# Altium PCB MU-VIDEO-HDMI.PcbDoc
Units mm, origin at the board's own origin, x right, y up, seen from the top; angles counter-clockwise.
Board outline 156.8 x 90 mm, 4 copper layers (Top Layer, Int1, Int2, Bottom Layer), stack 1.036 mm thick; 4 components, 132 nets, 170 pads, 0 vias.
Unrouted connection lines stored in the file: 127.
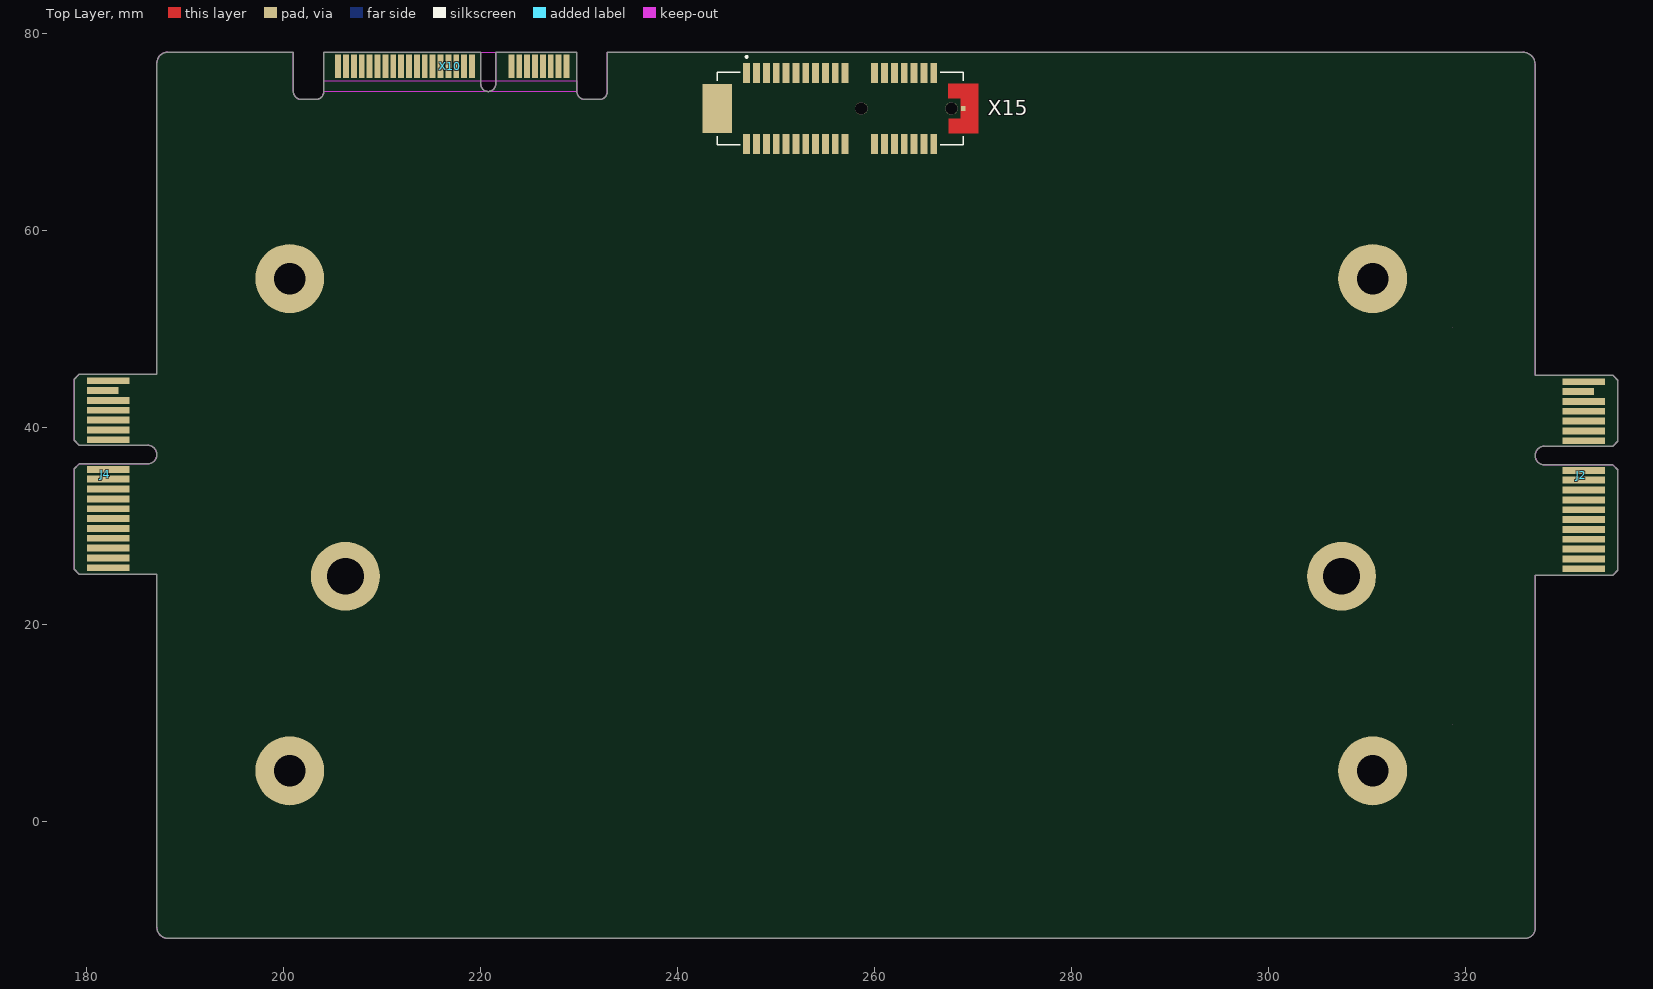
[diagram p0: Top Layer view]
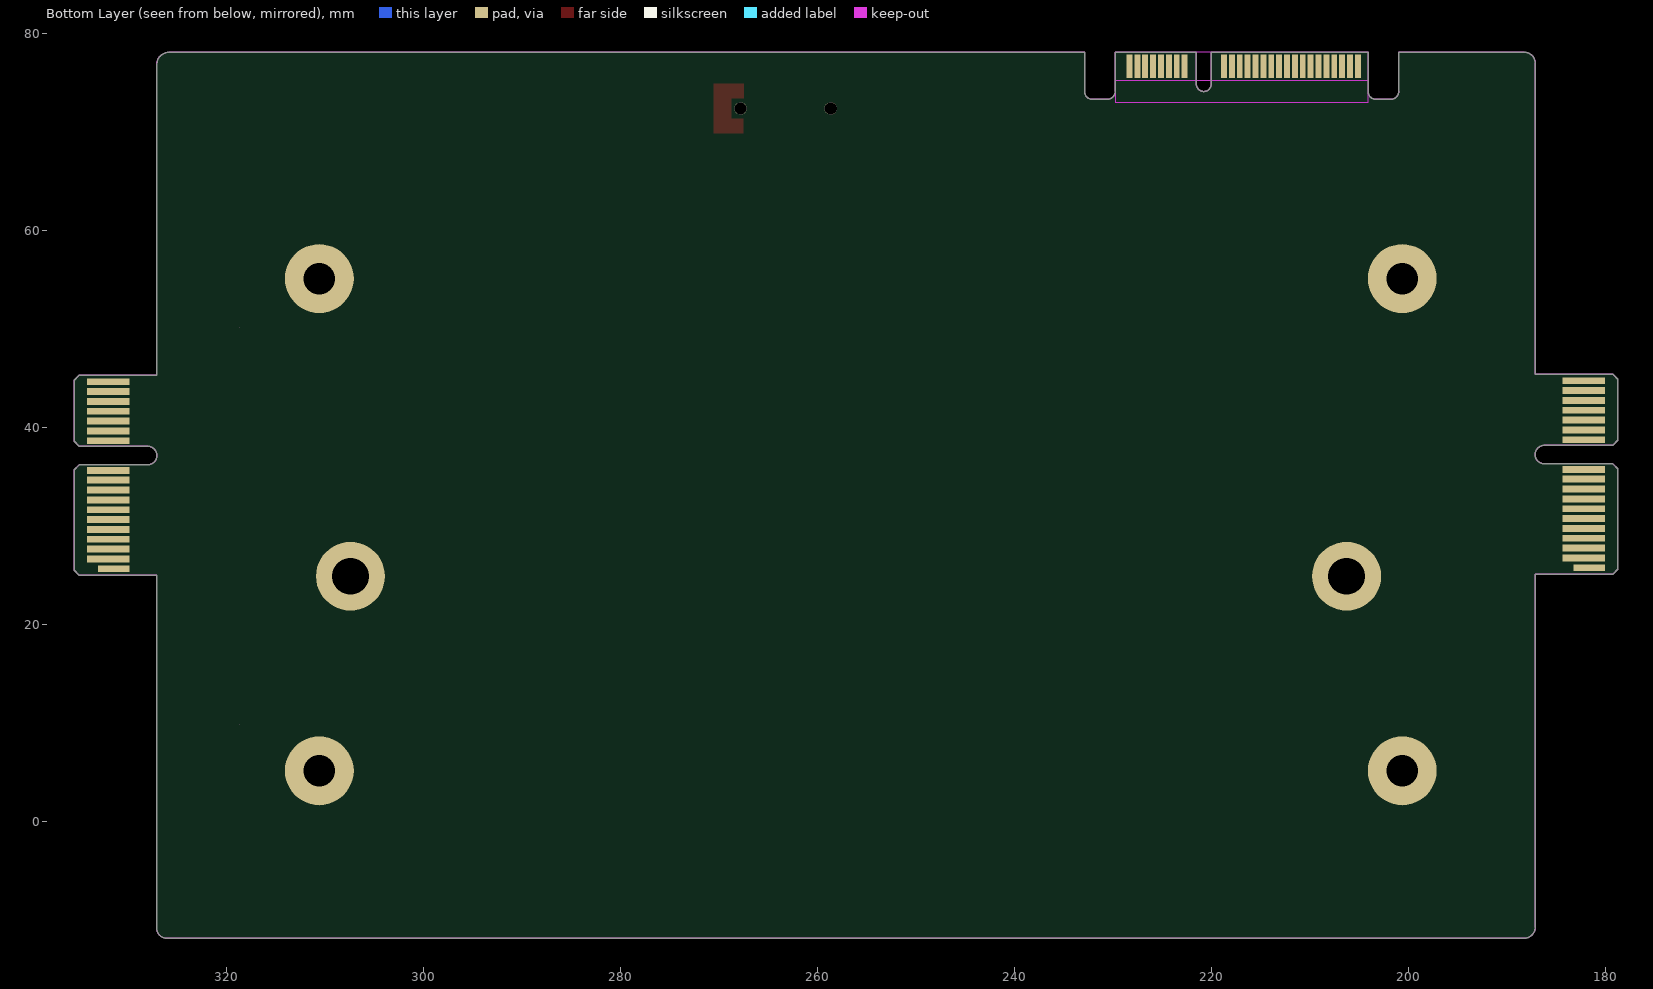
[diagram p1: Bottom Layer view, seen from below]
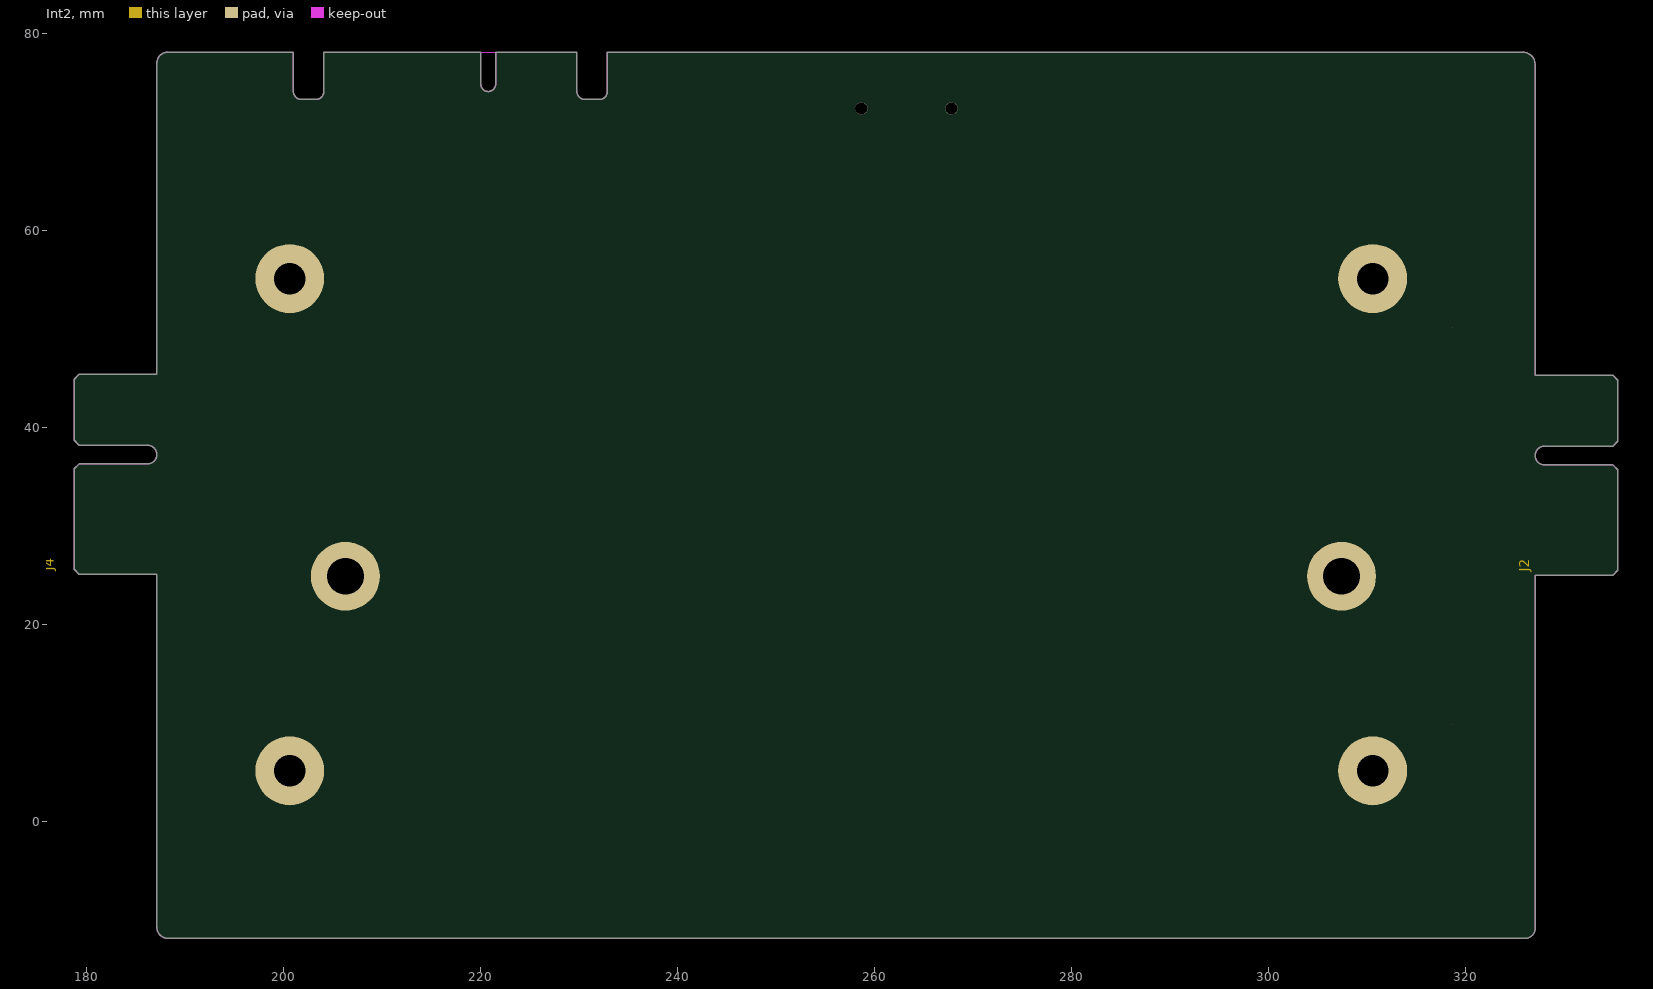
[diagram p2: Int2]

## Layer stack, top to bottom
Top Solder: solder mask 0.0254, SM-001, Dk 3.5
Top Layer: signal copper 0.018
Dielectric 1: prepreg 0.127, FR4, Dk 4.2
Int1: signal copper 0.018
Dielectric 2: core 0.71, FR4, Dk 4.6
Int2: signal copper 0.018
Dielectric 3: prepreg 0.127, FR4, Dk 4.2
Bottom Layer: signal copper 0.018
Bottom Solder: solder mask 0.0254, SM-001, Dk 3.5

## Board outline
178.725,35.8 179.225,36.3 186.175,36.3 ccw(c186.175,37.25) 187.125,37.25 ccw(c186.175,37.25) 186.175,38.2 179.225,38.2 178.725,38.7 178.725,44.9 179.225,45.4 187.125,45.4 187.125,77.025 cw(c188.225,77.025) 188.225,78.125 200.985,78.125 200.985,74.15 ccw(c201.81,74.15) 201.81,73.325 203.283,73.325 ccw(c203.283,74.125) 204.083,74.125 204.083,78.125 220.033,78.125 220.033,74.875 ccw(c220.783,74.875) 220.783,74.125 220.785,74.125 ccw(c220.785,74.874) 221.533,74.874 221.533,78.125 229.783,78.125 229.783,74.151 ccw(c230.61,74.151) 230.61,73.325 232.085,73.325 ccw(c232.085,74.125) 232.885,74.125 232.885,78.125 325.855,78.125 cw(c325.855,76.855) 327.125,76.855 327.125,45.3 335.025,45.3 335.525,44.8 335.525,38.6 335.025,38.1 328.075,38.1 ccw(c328.075,37.15) 327.125,37.15 ccw(c328.075,37.15) 328.075,36.2 335.025,36.2 335.525,35.7 335.525,25.5 335.025,25 327.125,25 327.125,-10.875 cw(c326.125,-10.875) 326.125,-11.875 265.825,-11.875 188.225,-11.875 cw(c188.225,-10.775) 187.125,-10.775 187.125,25.1 179.225,25.1 178.725,25.6

## Design rules (kind name [scope] priority, off if disabled: settings)
BoardOutlineClearance [All] p1: gap=0.4 ignorepadtopadclearanceinfootprint=FALSE
Clearance Clearance_1 [InDifferentialPairClass('MDI_DIFF100') or InDifferentialPairClass('LVDS')or InDifferentialPairClass('PCIE_CLK') or InDifferentialPairClass('PCIE_Z85')or InDifferentialPairClass('USB') vs InPolygonClass('GND')] p1: gap=0.7 ignorepadtopadclearanceinfootprint=FALSE
Clearance [All] p2: gap=0.15 ignorepadtopadclearanceinfootprint=FALSE except(0.25: Arc-Hole Track-Hole SMDPad-Hole THPad-Hole Via-Hole Fill-Hole Poly-Hole Region-Hole Text-Hole)
ComponentClearance ComponentClearance_1 [All] p1: gap=-1 collisioncheckmode=3 verticalgap=-1 showdistances=FALSE
ComponentClearance [InLayerClass('New Class') vs InLayerClass('New Class')] p2: gap=0 collisioncheckmode=3 verticalgap=0 showdistances=FALSE
DiffPairsRouting PCIE_DIFF85 [InDifferentialPairClass('PCIE_Z85')] p1: maxlimit=0.25 minlimit=0.15 mostfreqgap=0.25 toplayer_maxgap=0.15 toplayer_prefgap=0.15 toplayer_minwidth=0.15 toplayer_maxwidth=0.15 toplayer_prefwidth=0.15 midlayer1_mingap=0.25 midlayer1_minwidth=0.15 midlayer1_maxwidth=0.15 midlayer1_prefwidth=0.15 midlayer5_minwidth=0.381 midlayer5_maxwidth=0.381 midlayer5_prefwidth=0.381 bottomlayer_maxgap=0.15 bottomlayer_prefgap=0.15 bottomlayer_minwidth=0.15 bottomlayer_maxwidth=0.15 bottomlayer_prefwidth=0.15 impedanceprofiledriven=TRUE maxuncoupledlength=12.7
DiffPairsRouting PCIE_DIFF100 [InDifferentialPairClass('PCIE_CLK')] p2: maxlimit=0.25 minlimit=0.15 mostfreqgap=0.25 toplayer_maxgap=0.15 toplayer_prefgap=0.15 toplayer_minwidth=0.15 toplayer_maxwidth=0.15 toplayer_prefwidth=0.15 midlayer1_mingap=0.25 midlayer1_minwidth=0.15 midlayer1_maxwidth=0.15 midlayer1_prefwidth=0.15 midlayer5_minwidth=0.381 midlayer5_maxwidth=0.381 midlayer5_prefwidth=0.381 bottomlayer_maxgap=0.15 bottomlayer_prefgap=0.15 bottomlayer_minwidth=0.15 bottomlayer_maxwidth=0.15 bottomlayer_prefwidth=0.15 impedanceprofiledriven=TRUE maxuncoupledlength=12.7
DiffPairsRouting LVDS_DIFF100 [InDifferentialPairClass('LVDS')] p3: maxlimit=0.25 minlimit=0.15 mostfreqgap=0.25 toplayer_maxgap=0.15 toplayer_prefgap=0.15 toplayer_minwidth=0.15 toplayer_maxwidth=0.15 toplayer_prefwidth=0.15 midlayer1_mingap=0.25 midlayer1_minwidth=0.15 midlayer1_maxwidth=0.15 midlayer1_prefwidth=0.15 midlayer5_minwidth=0.381 midlayer5_maxwidth=0.381 midlayer5_prefwidth=0.381 bottomlayer_maxgap=0.15 bottomlayer_prefgap=0.15 bottomlayer_minwidth=0.15 bottomlayer_maxwidth=0.15 bottomlayer_prefwidth=0.15 impedanceprofiledriven=TRUE maxuncoupledlength=12.7
DiffPairsRouting USB_DIFF90 [InDifferentialPairClass('USB')] p4: maxlimit=0.15 minlimit=0.15 mostfreqgap=0.15 toplayer_minwidth=0.195 toplayer_maxwidth=0.195 toplayer_prefwidth=0.195 midlayer1_minwidth=0.381 midlayer1_maxwidth=0.381 midlayer1_prefwidth=0.381 midlayer5_minwidth=0.381 midlayer5_maxwidth=0.381 midlayer5_prefwidth=0.381 bottomlayer_minwidth=0.195 bottomlayer_maxwidth=0.195 bottomlayer_prefwidth=0.195 impedanceprofiledriven=TRUE maxuncoupledlength=12.7
DiffPairsRouting [All] p5: maxlimit=0.254 minlimit=0.16 mostfreqgap=0.2 toplayer_minwidth=0.2 toplayer_maxwidth=0.5 toplayer_prefwidth=0.3 midlayer1_minwidth=0.2 midlayer1_maxwidth=0.5 midlayer1_prefwidth=0.3 midlayer5_minwidth=0.2 midlayer5_maxwidth=0.5 midlayer5_prefwidth=0.3 bottomlayer_minwidth=0.2 bottomlayer_maxwidth=0.5 bottomlayer_prefwidth=0.3 maxuncoupledlength=12.7
FabricationTestpoint [(IsPad And (OnTopLayer Or OnBottomLayer))] p1: side=3 testpointundercomponent=TRUE minsize=1.016 maxsize=2.54 preferedsize=1.524 minholesize=0 maxholesize=1.016 preferedholesize=0.813 testpointgrid=0.025 allowsidetop=TRUE allowsidebottom=TRUE usegrid=TRUE gridtolerance=0
FanoutControl Fanout_Default [All] p1: bgadir=Out bgaviamode=Centered fanoutstyle=Auto fanoutdirection=Alternating viagrid=0.025 // Fanout_Default (Default Rule)
FanoutControl Fanout_Small [(CompPinCount < 5)] p2: bgadir=Out bgaviamode=Centered fanoutstyle=Auto fanoutdirection=OutThenIn viagrid=0.025 // Fanout_Small (Default Rule)
FanoutControl Fanout_LCC [IsLCC] p4: bgadir=Out bgaviamode=Centered fanoutstyle=Auto fanoutdirection=Alternating viagrid=0.025 // Fanout_LCC (Default Rule)
FanoutControl Fanout_BGA [IsBGA] p5: bgadir=Out bgaviamode=Centered fanoutstyle=Auto fanoutdirection=Alternating viagrid=0.025 // Fanout_BGA (Default Rule)
Height [All] p1: minheight=0 maxheight=50 prefheight=12.7
HoleSize [All] p1: absolutevalues=TRUE maxlimit=5 minlimit=0.025 maxpercent=80.000 minpercent=20.000
HoleToHoleClearance HoleToHoleClearance_1 [InPadClass('pad_mult') vs InPadClass('pad_mult')] p1: gap=0 allowstackedmicrovias=TRUE
HoleToHoleClearance [All] p2: gap=0.254 allowstackedmicrovias=TRUE
MatchedLengths MatchedLengths_LVDS_Within [InxSignalClass('LVDS_X')] p1: tolerance=0.5 checknetsindiffpair=TRUE checkdiffpairvsdiffpair=FALSE checkxsignals=FALSE checkothers=FALSE usedelayunits=TRUE delaytolerance=2.000000
MatchedLengths MatchedLengths_LVDS_Group [InxSignalClass('LVDS_X')] p2: tolerance=0.4 checknetsindiffpair=FALSE checkdiffpairvsdiffpair=TRUE checkxsignals=TRUE checkothers=TRUE usedelayunits=TRUE delaytolerance=8.000000
MatchedLengths MatchedLengths_PCIE_Within [InxSignalClass('PCIE_X')] p3: tolerance=0.5 checknetsindiffpair=TRUE checkdiffpairvsdiffpair=FALSE checkxsignals=FALSE checkothers=FALSE usedelayunits=TRUE delaytolerance=2.000000
MatchedLengths MatchedLengths_PCIE_Group [InxSignalClass('PCIE_X')] p4: tolerance=0.5 checknetsindiffpair=FALSE checkdiffpairvsdiffpair=TRUE checkxsignals=TRUE checkothers=TRUE usedelayunits=TRUE delaytolerance=8.000000
MinimumSolderMaskSliver MinimumSolderMaskSliver_1 [InComponent('W2') vs InPadClass('pad_mult')] p1: minsoldermaskwidth=0
MinimumSolderMaskSliver [All] p2: minsoldermaskwidth=0.01
PlaneClearance [All] p1: clearance=0.5
PlaneConnect [All] p1: planeconnectstyle=Direct reliefexpansion=0.5 reliefentries=4 reliefconductorwidth=0.25 reliefairgap=0.25
PolygonConnect PolygonConnect_2 [All vs InPolygonClass('PWR')] p1: connectstyle=Direct reliefconductorwidth=0.254 reliefentries=4 polygonreliefangle="90 Angle" airgapwidth=0.254
PolygonConnect PolygonConnect_1 [IsVia] p2: connectstyle=Direct reliefconductorwidth=0.254 reliefentries=4 polygonreliefangle="90 Angle" airgapwidth=0.254
PolygonConnect [All] p3: connectstyle=Relief reliefconductorwidth=0.25 reliefentries=4 polygonreliefangle="90 Angle" airgapwidth=0.25
RoutingVias [All] p1: holewidth=0.15 width=0.35 viastyle="Through Hole" minholewidth=0.15 minwidth=0.35 maxholewidth=0.6 maxwidth=1.2
SilkToSilkClearance [All] p1: silktosilkclearance=0.1
SilkToSolderMaskClearance SilkscreenOverComponentPads [IsPad] p1: minsilkscreentomaskgap=0 clearancetoexposedcopper=TRUE
SolderMaskExpansion [All] p1: expansion=0.1 istentingtop=FALSE
SupplyNets "Schematic Supply Nets_14" [InNet('GND_ISO')] p1: voltage=0.000
SupplyNets "Schematic Supply Nets_13" [InNet('EXT_GND1')] p2: voltage=0.000
SupplyNets "Schematic Supply Nets_12" [InNet('VDD-ISO')] p3: voltage=0.000
SupplyNets "Schematic Supply Nets_11" [InNet('+1.8V_RESRV')] p4: voltage=0.000
SupplyNets "Schematic Supply Nets_10" [InNet('+3.3V_VCC_SYS')] p5: voltage=0.000
SupplyNets "Schematic Supply Nets_8" [InNet('+9.3V')] p6: voltage=0.000
SupplyNets "Schematic Supply Nets_6" [InNet('+0.9V_PHY')] p7: voltage=0.000
SupplyNets "Schematic Supply Nets_4" [InNet('+10-30V_IN')] p8: voltage=0.000
SupplyNets "Schematic Supply Nets_3" [InNet('GND')] p9: voltage=0.000
SupplyNets "Schematic Supply Nets_1" [InNet('GND_VLED')] p10: voltage=0.000
SupplyNets "Schematic Supply Nets" [InNet('+5V')] p11: voltage=0.000
Width [All] p1: maxlimit=2 minlimit=0.15 preferedwidth=0.16 toplayer_minwidth=0.16 midlayer1_minwidth=0.16 midlayer5_prefwidth=0.15 bottomlayer_minwidth=0.16 minimp=50.000000 maximp=50.000000 favimp=50.000000
15 further rules are at their usual default settings.

## Classes and differential pairs
differential pair class USB: DATA USB1_KEYB_D USB2_PCAP_D USB3_UART_D
differential pair class MDI_DIFF100: ETH_RX ETH_TX
differential pair class LVDS: LVDS_TX0_CLK LVDS_TX0_D0 LVDS_TX0_D1 LVDS_TX0_D2 LVDS_TX0_D3
differential pair class PCIE_Z85: RX RX_CAP TX TX_CAP
differential pair class PCIE_CLK: CLK
component class A2: X10
differential pair TX_CAP: +TX_CAP_P -TX_CAP_N
differential pair RX_CAP: +RX_CAP_P -RX_CAP_N
differential pair USB3_UART_D: +USB3_UART_D_P -USB3_UART_D_N
differential pair USB2_PCAP_D: +USB2_PCAP_D_P -USB2_PCAP_D_N
differential pair USB1_KEYB_D: +USB1_KEYB_D_P -USB1_KEYB_D_N
differential pair TX: +TX_P -TX_N
differential pair RX: +RX_P -RX_N
differential pair LVDS_TX0_D3: +LVDS_TX0_D3_P -LVDS_TX0_D3_N
differential pair LVDS_TX0_D2: +LVDS_TX0_D2_P -LVDS_TX0_D2_N
differential pair LVDS_TX0_D1: +LVDS_TX0_D1_P -LVDS_TX0_D1_N
differential pair LVDS_TX0_D0: +LVDS_TX0_D0_P -LVDS_TX0_D0_N
differential pair LVDS_TX0_CLK: +LVDS_TX0_CLK_P -LVDS_TX0_CLK_N
differential pair ETH_TX: +ETH_TX_P -ETH_TX_N
differential pair ETH_RX: +ETH_RX_P -ETH_RX_N
differential pair DATA: +DATA_P -DATA_N
differential pair CLK: +CLK_P -CLK_N

## Components (designator, comment, footprint, x,y, rotation, side; value= is the part's Value field where it differs from the comment)
J2 "Comment" BUS_PCIexpress_x1 332.075,25.65 r90 top value=Bus_PCI_Express_x1
J4 "Comment" BUS_PCIexpress_x1 182.175,25.75 r90 top value=Bus_PCI_Express_x1
X10 "MPCIE-MPC-CARD-001" MPCIE-MPC-CARD-001 220.785,72.725 r180 top
X15 "3113-110T" 3113-110T 258.687,72.4 r0 top locked

## Footprints (in the part's own frame and the unit in brackets; to place one, negate y for a bottom-side part, rotate by r counter-clockwise, add the part's x,y. Pads: shape width x height; smd on the part's side, far side on the other; paste and mask are expansions set on the pad)
3113-110T [mm]
  rect 0.7x2 smd: A1(-11.65,3.6) A2(-10.65,3.6) A3(-9.65,3.6) A4(-8.65,3.6) A5(-7.65,3.6) A6(-6.65,3.6) A7(-5.65,3.6) A8(-4.65,3.6) A9(-3.65,3.6) A10(-2.65,3.6) A11(-1.65,3.6) A12(1.35,3.6) A13(2.35,3.6) A14(3.35,3.6) A15(4.35,3.6) A16(5.35,3.6) A17(6.35,3.6) A18(7.35,3.6) B1(-11.65,-3.6) B2(-10.65,-3.6) B3(-9.65,-3.6) B4(-8.65,-3.6) B5(-7.65,-3.6) B6(-6.65,-3.6) B7(-5.65,-3.6) B8(-4.65,-3.6) B9(-3.65,-3.6) B10(-2.65,-3.6) B11(-1.65,-3.6) B12(1.35,-3.6) B13(2.35,-3.6) B14(3.35,-3.6) B15(4.35,-3.6) B16(5.35,-3.6) B17(6.35,-3.6) B18(7.35,-3.6)
  rect 3x5 smd: SH1(-14.65,0)
  rect 0.5x0.5 smd paste-1 mask+0: SH2(10.35,0)
  round 1.25 hole 1.25 unplated: ""(0,0) ""(9.15,0)
  Top Layer region: 8.842,1.062 10.099,1.062 10.099,-1.016 8.852,-1.016 8.852,-2.5 11.85,-2.5 11.85,2.499 8.849,2.499
  silkscreen extent -14.65,-3.7 10.35,5.35, body extent -15.65,-5.1 11.35,4.1, height 11.1
BUS_PCIexpress_x1 [mm]
  rect 0.7x3.2 smd far side paste-3.2 mask-3.2: A1(0,0.55)
  rect 0.7x4.3 smd far side paste-4.3 mask-4.3: A2(1,0) A3(2,0) A4(3,0) A5(4,0) A6(5,0) A7(6,0) A8(7,0) A9(8,0) A10(9,0) A11(10,0) A12(13,0) A13(14,0) A14(15,0) A15(16,0) A16(17,0) A17(18,0) A18(19,0)
  rect 0.7x4.3 smd paste-4.3 mask-4.3: B1(0,0) B2(1,0) B3(2,0) B4(3,0) B5(4,0) B6(5,0) B7(6,0) B8(7,0) B9(8,0) B10(9,0) B11(10,0) B12(13,0) B13(14,0) B14(15,0) B15(16,0) B16(17,0) B18(19,0)
  rect 0.7x3.2 smd paste-3.2 mask-3.2: B17(18,0.55)
MPCIE-MPC-CARD-001 [mm]
  rect 0.6x2.4 smd: 1(-7.949,-3.95) 3(-7.149,-3.95) 5(-6.349,-3.95) 7(-5.549,-3.95) 9(-4.749,-3.95) 11(-3.949,-3.95) 13(-3.149,-3.95) 15(-2.349,-3.95) 17(1.651,-3.95) 19(2.451,-3.95) 21(3.251,-3.95) 23(4.051,-3.95) 25(4.851,-3.95) 27(5.651,-3.95) 29(6.451,-3.95) 31(7.251,-3.95) 33(8.051,-3.95) 35(8.851,-3.95) 37(9.651,-3.95) 39(10.451,-3.95) 41(11.251,-3.95) 43(12.051,-3.95) 45(12.851,-3.95) 47(13.651,-3.95) 49(14.451,-3.95) 51(15.251,-3.95)
  rect 0.6x2.4 smd far side: 2(-7.549,-3.95) 4(-6.749,-3.95) 6(-5.949,-3.95) 8(-5.149,-3.95) 10(-4.349,-3.95) 12(-3.549,-3.95) 14(-2.749,-3.95) 16(-1.949,-3.95) 18(2.051,-3.95) 20(2.851,-3.95) 22(3.651,-3.95) 24(4.451,-3.95) 26(5.251,-3.95) 28(6.051,-3.95) 30(6.851,-3.95) 32(7.651,-3.95) 34(8.451,-3.95) 36(9.251,-3.95) 38(10.051,-3.95) 40(10.851,-3.95) 42(11.651,-3.95) 44(12.451,-3.95) 46(13.251,-3.95) 48(14.051,-3.95) 50(14.851,-3.95) 52(15.651,-3.95)
  Top Layer keep-out region: -8.999,-2.5 -8.999,-1.4 16.701,-1.4 16.701,-2.5
  Bottom Layer keep-out region: -8.999,-2.5 -8.999,-0.3 16.701,-0.3 16.701,-2.5
  Keep-Out Layer board cut-out: -0.749,-5.4 -0.749,-2.149 -0.692,-1.862 -0.529,-1.619 -0.287,-1.457 0,-1.4 0,-1.4 0.001,-1.4 0.288,-1.457 0.532,-1.62 0.694,-1.863 0.751,-2.15 0.751,-2.15 0.751,-5.4

## Part data
J2 J4: library part BUS_PCIexpress_x1, "PCIexpress Bus Edge Connector x1 http://www.ritrontek.com/uploadfile/2016/1026/20161026105231124.pdf#page=70", Datasheet=http://www.ritrontek.com/uploadfile/2016/1026/20161026105231124.pdf#page=63, Description="PCI Express bus connector x1", ki_fp_filters=*PCIexpress*
X10: library part MPCIE-MPC-CARD-REV4, "custom mPCIE card for MPC", Manufacturer=No, Check=False, ComponentLink1Description=DATASHEET, Last changed=25.01.2024, NameFromManufacturer=No, Part Number=MPCIE-MPC-CARD-REV4, Place=*)
X15: "PCI Connector, Vertical, Surface Mount, x1, 36 Positions, 1.00mm (0.039in) Pitch", Manufacturer=UMAX, Check=False, NameFromManufacturer=3113-110T, Part Number=3113-110T

## Free pads (board coordinates)
  round 7 hole 3.2 mask+0.1: ""(200.625,5.125) ""(200.625,55.125) ""(310.625,5.125) ""(310.625,55.125)
  round 7 hole 3.73 mask+0.1: ""(206.277,24.887) ""(307.462,24.887)

## Nets (pads, with @x,y where several pads share a name; then routed paths per layer and width w, separated by ;. In a path a pad name is that pad's centre, name@x,y a point inside that pad or via, vN(x,y) a via of type N, cw(c..) or ccw(c..) an arc to the next point about the centre after c; other vN are vias at no path point)
+0.9V_PHY: 
+1.8V_RESRV: 
+3.3V_VCC_SYS: 
+5V: 
+9.3V: 
+10-30V_IN: X10.42 X10.44 X10.46 X10.48 X10.50 X10.52
CLK_N: X10.5
CLK_P: X10.7
CLKREQ#: X10.12
CTRL: 
DATA_N: X10.36
DATA_P: X10.38
DISP_INT: 
DISP_PWM: 
DISP_RST: 
DISP_STBYB: 
ETH0_ACT: 
ETH0_LINK: 
ETH_CTRL.PHY-PMIC-EN: 
ETH_RX_N: 
ETH_RX_P: 
ETH_TX_N: 
ETH_TX_P: 
EXT_GND1: 
GND: X10.1 X10.2 X10.3 X10.4 X10.6 X10.8 X10.9 X10.10 X10.15 X10.16 X10.17 X10.18 X10.23 X10.24 X10.26 X10.28 X10.29 X10.34 X10.35 X10.41 X10.43
GND_ISO: 
GND_VLED: 
HUB_XI: 
HUB_XO: 
I2C.SCL: X10.30
I2C.SDA: X10.32
LVDS_TX0_CLK_N: 
LVDS_TX0_CLK_P: 
LVDS_TX0_D0_N: 
LVDS_TX0_D0_P: 
LVDS_TX0_D1_N: 
LVDS_TX0_D1_P: 
LVDS_TX0_D2_N: 
LVDS_TX0_D2_P: 
LVDS_TX0_D3_N: 
LVDS_TX0_D3_P: 
MPC-CLK: X10.51
MPC-CS#: X10.45
MPC-MISO: X10.47
MPC-MOSI: X10.49
NetBQ1_1: 
NetBQ1_3: 
NetC2_1: 
NetC2_2: 
NetC3_2: 
NetC11_1: 
NetC15_2: 
NetC16_2: 
NetC17_2: 
NetC18_1: 
NetC18_2: 
NetC21_1: 
NetC23_1: 
NetC27_2: 
NetC28_1: 
NetC28_2: 
NetC29_2: 
NetC33_2: 
NetC36_1: 
NetC37_1: 
NetC42_1: 
NetC51_1: 
NetC63_1: 
NetC85_1: 
NetC90_1: 
NetC90_2: 
NetC95_1: 
NetD1_7: 
NetD1_8: 
NetD1_9: 
NetD2_4: 
NetD3_3: 
NetD3_5: 
NetD4_2: 
NetD4_8: 
NetD5_5: 
NetD7_1: 
NetD7_2: 
NetD7_3: 
NetD7_9: 
NetD7_12: 
NetD8_2: 
NetD8_4: 
NetD8_9: 
NetD10_4: 
NetD10_5: 
NetD10_7: 
NetD10_11: 
NetD10_13: 
NetD10_15: 
NetR9_2: 
NetR12_2: 
NetR20_2: 
NetR26_2: 
NetR37_2: 
NetR54_1: 
NetR55_1: 
NetR57_1: 
NetR59_1: 
PERST#: X10.20
RS-A: 
RS-B: 
RX_CAP_N: 
RX_CAP_P: 
RX_N: X10.27
RX_P: X10.25
SPI.SPI_MISO: 
SPI.SPI_MOSI: 
TX_CAP_N: X10.21
TX_CAP_P: X10.19
TX_N: 
TX_P: 
UART_RX: 
UART_TX: 
USB1_KEYB_D_N: 
USB1_KEYB_D_P: 
USB2_PCAP_D_N: 
USB2_PCAP_D_P: 
USB3_UART_D_N: 
USB3_UART_D_P: 
USB_UART_RX: 
USB_UART_TX: 
VDD-ISO: 
XL: 
XR: 
YD: 
YU: 
pads on no net: J2.A1 J2.A2 J2.A3 J2.A4 J2.A5 J2.A6 J2.A7 J2.A8 J2.A9 J2.A10 J2.A11 J2.A12 J2.A13 J2.A14 J2.A15 J2.A16 J2.A17 J2.A18 J2.B1 J2.B2 J2.B3 J2.B4 J2.B5 J2.B6 J2.B7 J2.B8 J2.B9 J2.B10 J2.B11 J2.B12 J2.B13 J2.B14 J2.B15 J2.B16 J2.B17 J2.B18 J4.A1 J4.A2 J4.A3 J4.A4 J4.A5 J4.A6 J4.A7 J4.A8 J4.A9 J4.A10 J4.A11 J4.A12 J4.A13 J4.A14 J4.A15 J4.A16 J4.A17 J4.A18 J4.B1 J4.B2 J4.B3 J4.B4 J4.B5 J4.B6 J4.B7 J4.B8 J4.B9 J4.B10 J4.B11 J4.B12 J4.B13 J4.B14 J4.B15 J4.B16 J4.B17 J4.B18 X10.11 X10.13 X10.14 X10.22 X10.31 X10.33 X10.37 X10.39 X10.40 X15. X15.A1 X15.A2 X15.A3 X15.A4 X15.A5 X15.A6 X15.A7 X15.A8 X15.A9 X15.A10 X15.A11 X15.A12 X15.A13 X15.A14 X15.A15 X15.A16 X15.A17 X15.A18 X15.B1 X15.B2 X15.B3 X15.B4 X15.B5 X15.B6 X15.B7 X15.B8 X15.B9 X15.B10 X15.B11 X15.B12 X15.B13 X15.B14 X15.B15 X15.B16 X15.B17 X15.B18 X15.SH1 X15.SH2

## Keep-outs
Int2:
  lines w0.1: 200.985,78.125 200.985,74.15 ccw(c201.81,74.15) 201.81,73.325 203.283,73.325 ccw(c203.283,74.125) 204.083,74.125 204.083,78.125 220.033,78.125 220.033,74.875 ccw(c220.783,74.875) 220.783,74.125 220.785,74.125 ccw(c220.785,74.874) 221.533,74.874 221.533,78.125 ; 232.885,78.125 232.885,74.125 cw(c232.085,74.125) 232.085,73.325 230.61,73.325 cw(c230.61,74.151) 229.783,74.151 229.783,78.125 ; 327.125,25 335.025,25 335.525,25.5 335.525,35.7 335.025,36.2 328.075,36.2 cw(c328.075,37.15) 327.125,37.15 327.125,37.153 cw(c328.072,37.153) 328.072,38.1 335.025,38.1 335.525,38.6 335.525,44.8 335.025,45.3 327.125,45.3 ; 221.533,78.125 ccw(c221.533,78.125) 221.533,78.125 ; 221.533,78.125 229.783,78.125 ; 229.783,78.125 ccw(c229.783,78.125) 229.783,78.125
Keep-Out Layer:
  lines w0.1: 187.125,25.1 ccw(c187.125,25.1) 187.125,25.1 ; 187.125,25.1 179.225,25.1 178.725,25.6 178.725,35.8 179.225,36.3 186.175,36.3 ccw(c186.175,37.25) 187.125,37.25 ccw(c186.175,37.25) 186.175,38.2 179.225,38.2 178.725,38.7 178.725,44.9 179.225,45.4 187.125,45.4 187.125,77.025 ; 187.125,25.1 187.125,-10.775 ccw(c188.225,-10.775) 188.225,-11.875 265.825,-11.875 ; 187.125,77.025 cw(c188.225,77.025) 188.225,78.125 200.985,78.125 200.985,74.15 ccw(c201.81,74.15) 201.81,73.325 203.283,73.325 ccw(c203.283,74.125) 204.083,74.125 204.083,78.125 220.033,78.125 220.033,74.875 ccw(c220.783,74.875) 220.783,74.125 220.785,74.125 ccw(c220.785,74.874) 221.533,74.874 221.533,78.125 ; 187.125,77.025 187.125,77.025 ; 221.533,78.125 ccw(c221.533,78.125) 221.533,78.125 ; 221.533,78.125 229.783,78.125 ; 229.783,78.125 ccw(c229.783,78.125) 229.783,78.125 ; 229.783,78.125 229.783,74.151 ccw(c230.61,74.151) 230.61,73.325 232.085,73.325 ccw(c232.085,74.125) 232.885,74.125 232.885,78.125 325.855,78.125 cw(c325.855,76.855) 327.125,76.855 327.125,45.3 ; 265.825,-11.875 ccw(c265.825,-11.875) 265.825,-11.875 ; 265.825,-11.875 326.125,-11.875 ccw(c326.125,-10.875) 327.125,-10.875 327.125,25 335.025,25 335.525,25.5 335.525,35.7 335.025,36.2 328.075,36.2 cw(c328.075,37.15) 327.125,37.15 cw(c328.075,37.15) 328.075,38.1 335.025,38.1 335.525,38.6 335.525,44.8 335.025,45.3 327.125,45.3 ; 318.725,50.125 ccw(c318.725,50.125) 318.725,50.125 ; 318.725,50.125 ccw(c318.725,50.125) 318.725,50.125 ; 318.725,50.125 318.725,50.125 ; 327.125,45.3 ccw(c327.125,45.3) 327.125,45.3 ; 318.725,9.825 318.725,9.825

## Silkscreen, mask and mechanical layers (free items; w line width, h text height)
Top Solder:
  region: 179.787,45.4 185.625,45.4 185.625,25.1 179.679,25.1
  region: 329.687,45.3 335.525,45.3 335.525,25 329.579,25
Bottom Solder:
  region: 179.787,45.4 185.625,45.4 185.625,25.1 179.679,25.1
  region: 329.687,45.3 335.525,45.3 335.525,25 329.579,25